# Altium PCB UNO Shield_2021-10-31.pcbdoc
Units mil, origin at the board's own origin, x right, y up, seen from the top; angles counter-clockwise.
Board outline 3800 x 3200 mil, 2 copper layers (Top Layer, Bottom Layer); 26 components, 48 nets, 194 pads, 47 vias.
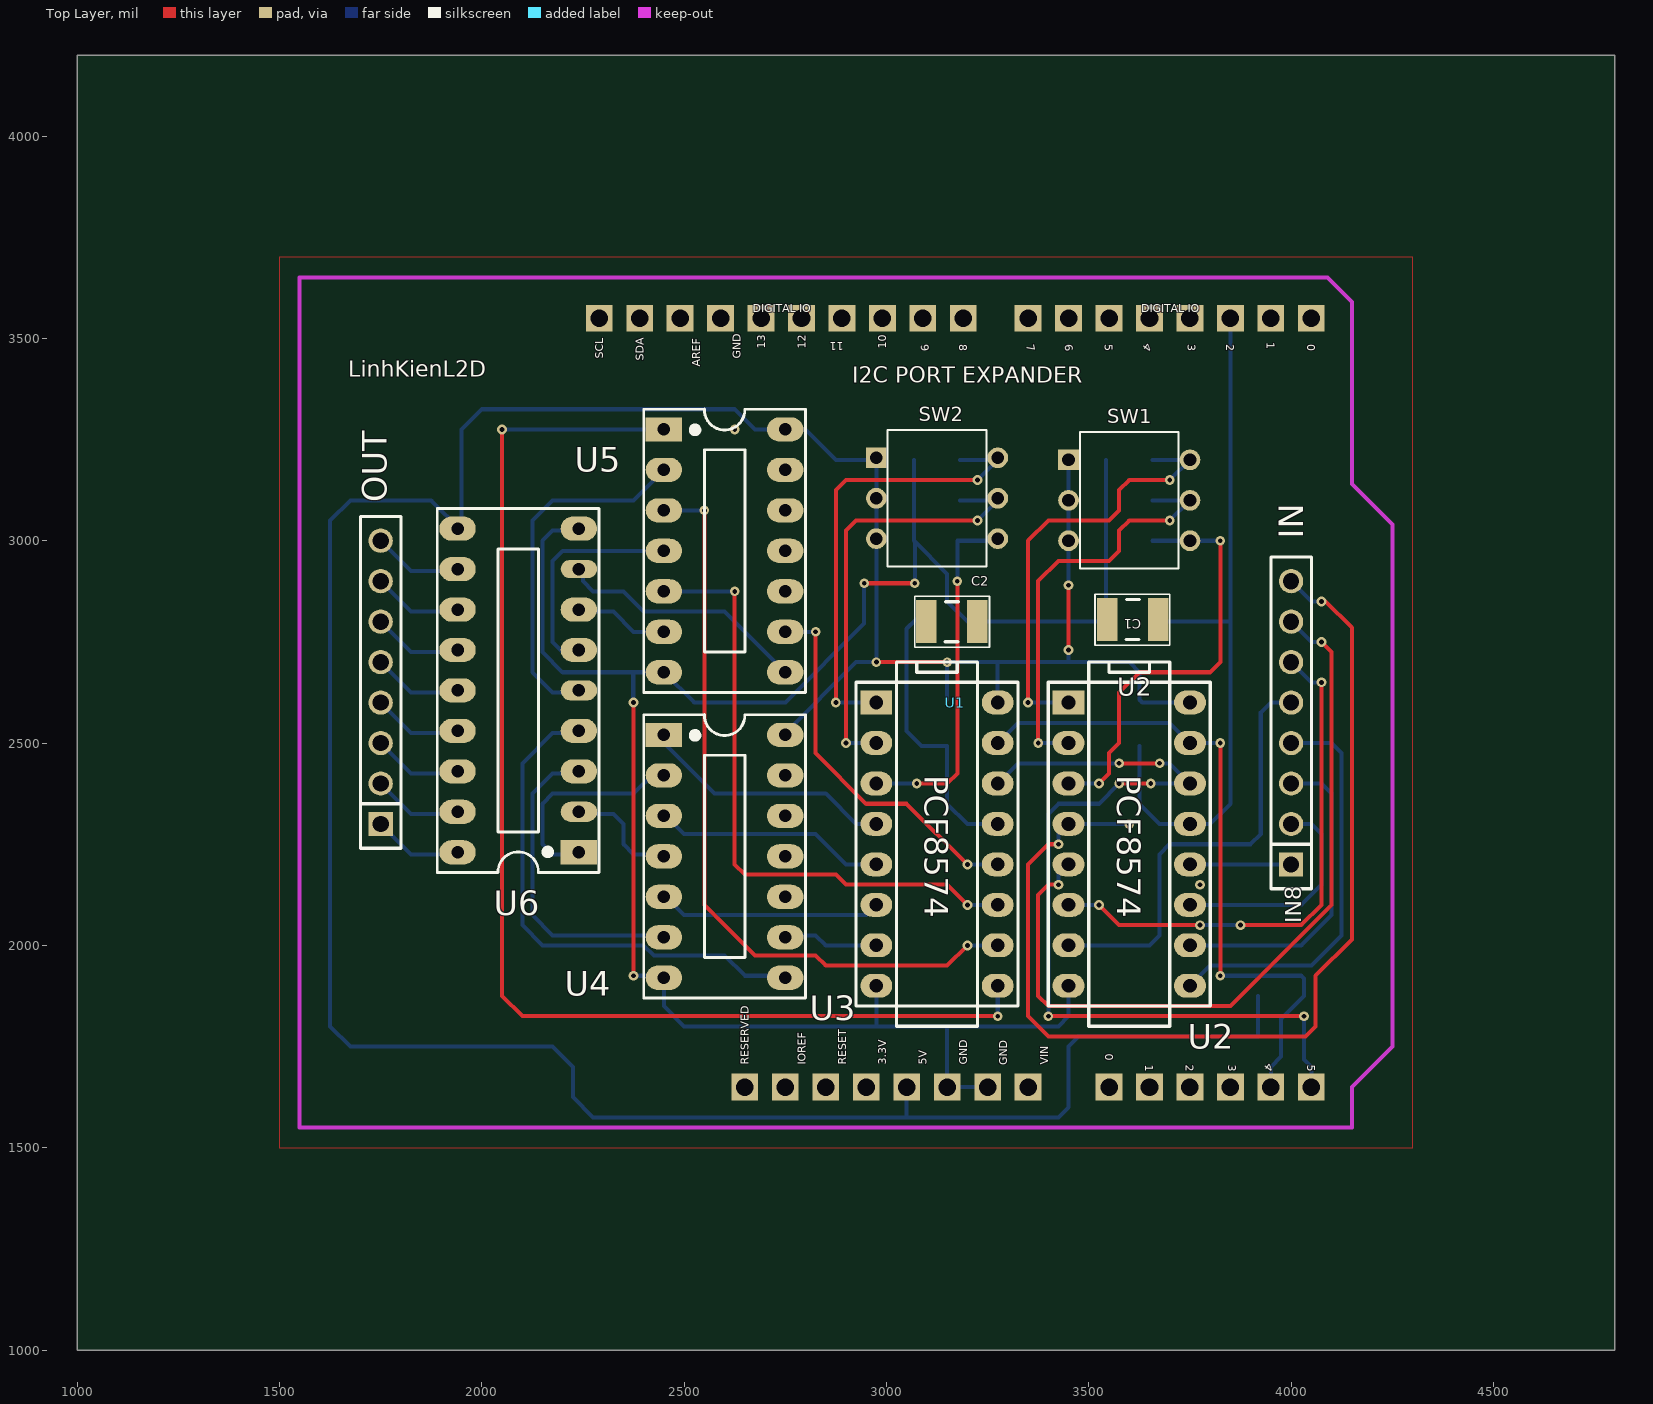
[diagram p0: Top Layer view]
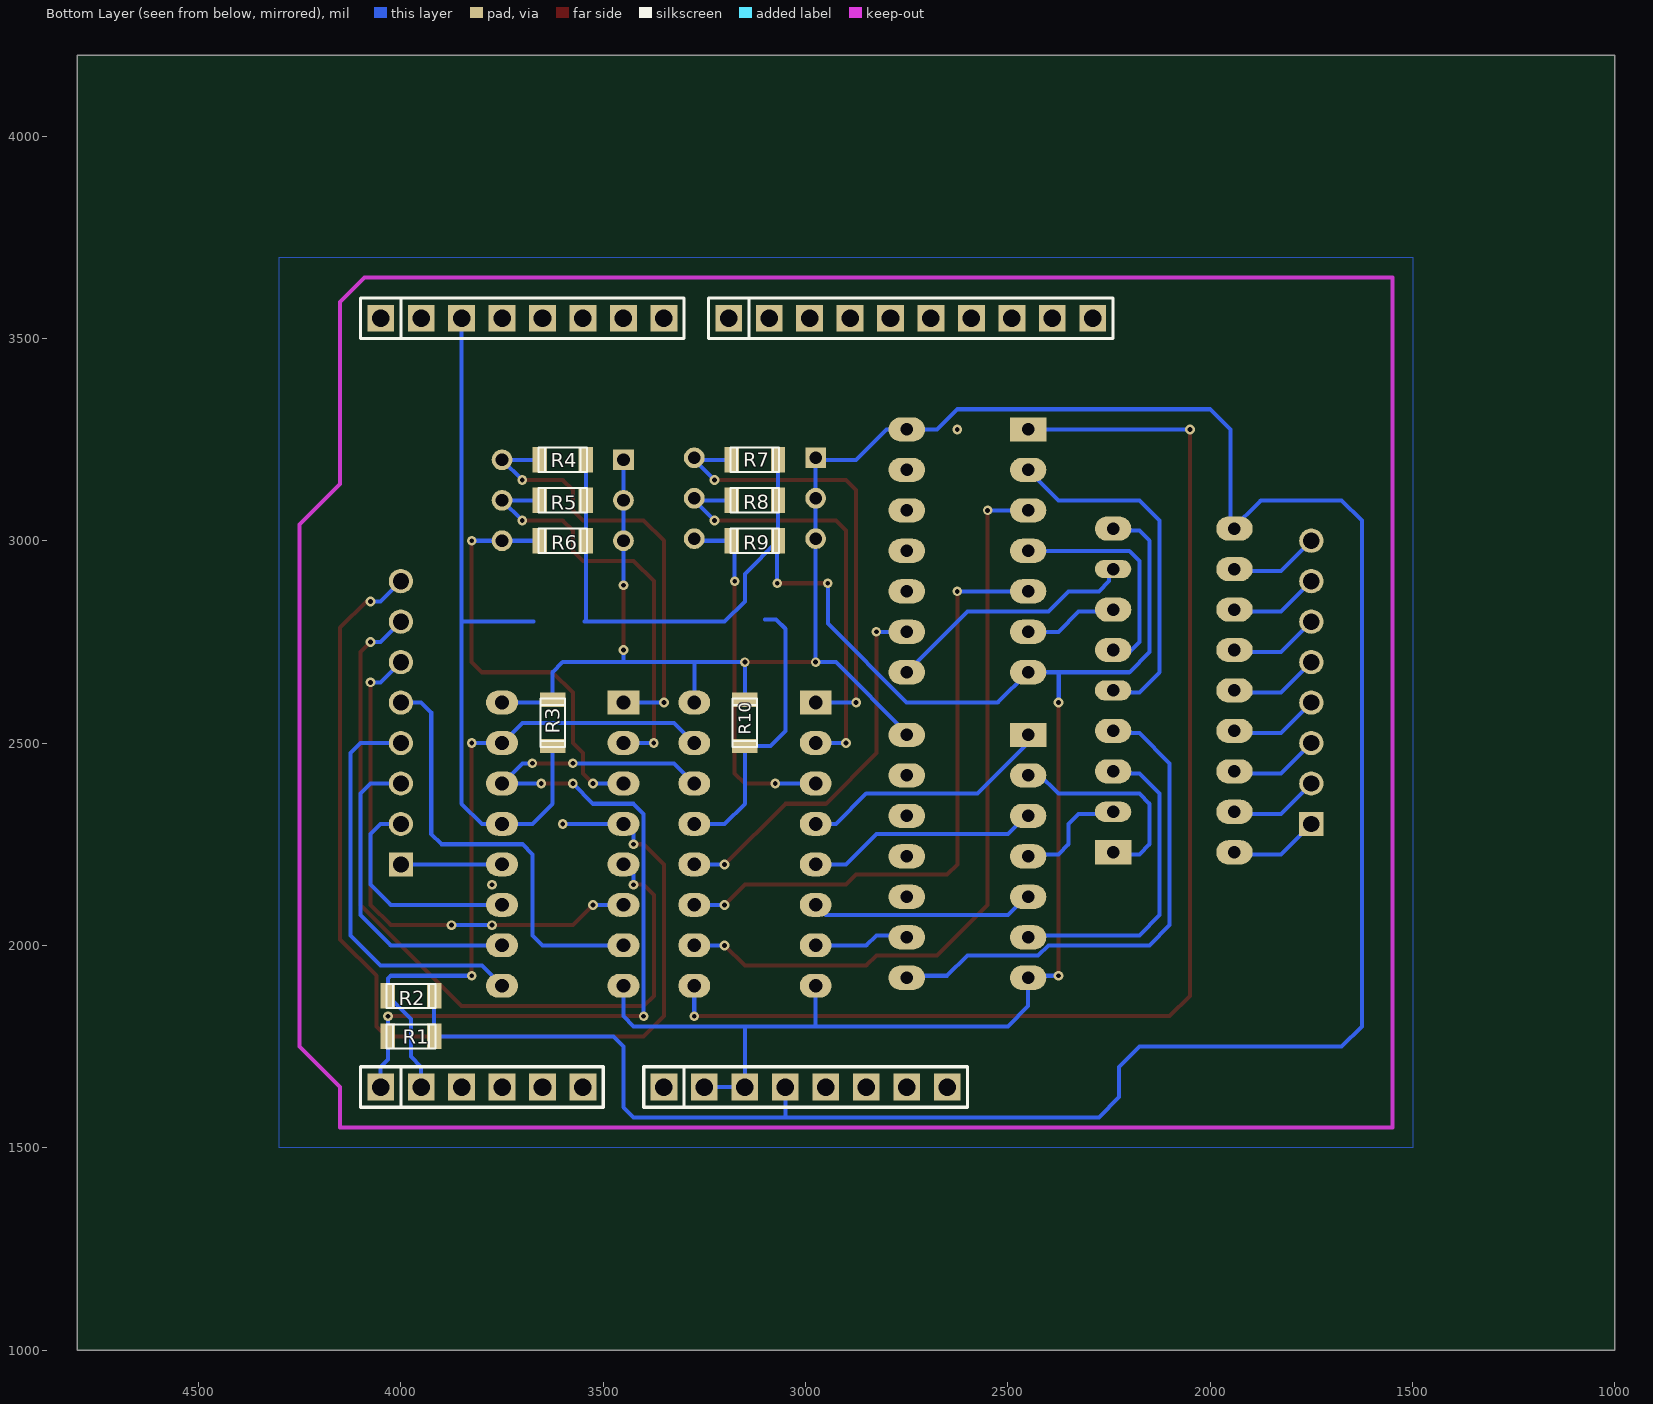
[diagram p1: Bottom Layer view, seen from below]

## Layer stack, top to bottom
Top Solder: solder mask 0.4, Solder Resist, Dk 3.5
Top Layer: signal copper 1.4
Dielectric1: dielectric 12.6, FR-4, Dk 4.8
Bottom Layer: signal copper 1.4
Bottom Solder: solder mask 0.4, Solder Resist, Dk 3.5

## Board outline
4800,1000 1000,1000 1000,4200 4800,4200

## Design rules (kind name [scope] priority, off if disabled: settings)
Clearance [All] p1: gap=10
PolygonConnect [All] p1: connectstyle=Relief reliefconductorwidth=10 reliefentries=4 polygonreliefangle="90 Angle" airgapwidth=10
RoutingVias [All] p1: holewidth=28 width=50 viastyle="Through Hole" minholewidth=28 minwidth=50 maxholewidth=28 maxwidth=50
SolderMaskExpansion [All] p1: expansion=4
Width [All] p1: maxlimit=10 minlimit=10 preferedwidth=10
30 further rules are at their usual default settings.

## Components (designator, comment, footprint, x,y, rotation, side; value= is the part's Value field where it differs from the comment)
C1 "Comment" CN-SMD-3225 3615,2805 r180 top
C2 "Comment" CN-SMD-3225 3155,2800 r0 top
IN "Comment" JP8-C1T 4000,2200 r90 top
OUT "Comment" JP8-C1T 1750,2300 r90 top
R1 "10k" 1206R 3975,1775 r0 bottom
R2 "10k" 1206R 3975,1875 r0 bottom
R3 "10k" 1206R 3625,2550 r270 bottom
R4 "10k" 1206R 3600,3200 r180 bottom
R5 "10k" 1206R 3600,3100 r180 bottom
R6 "10k" 1206R 3600,3000 r180 bottom
R7 "10k" 1206R 3125,3200 r180 bottom
R8 "10k" 1206R 3125,3100 r180 bottom
R9 "10k" 1206R 3125,3000 r180 bottom
R10 "10k" 1206R 3150,2550 r270 bottom
SW1 "Comment" SW-DIP3 3600,3100 r270 top
SW2 "Comment" SW-DIP3 3125,3105 r270 top
U1 "ARDUINOR3-DIMENSION" ARDUINOR3 3170,2600 r0 top
U2 "Comment" DIP16 3600,2250 r270 top
U3 "Comment" DIP16 3125,2250 r270 top
U4 "Comment" DIP14/W0.3 2450,2520 r270 top
U5 "Comment" DIP14/W0.3 2450,3275 r270 top
U6 "Comment" DIP18/W0.3 2240,2230 r90 top
? "Comment" JP6-D1T 4050,1650 r180 bottom
? "Comment" JP8-D1T 3350,1650 r180 bottom
? "Comment" JP10-D1T 3190,3550 r180 bottom
? "Comment" JP8-D1T 4050,3550 r180 bottom

## Footprints (in the part's own frame and the unit in brackets; to place one, negate y for a bottom-side part, rotate by r counter-clockwise, add the part's x,y. Pads: shape width x height; smd on the part's side, far side on the other; paste and mask are expansions set on the pad)
1206R [mil]
  rect 35.4x63 smd: 1(57.1,0) 2(-57.1,0)
  silkscreen extent -60,-30 60,30
ARDUINOR3 [mil]
  rect 66x66 hole 39.4: 3V(-220,-950) 5V(-120,-950) A0(380,-950) A1(480,-950) A2(580,-950) A3(680,-950) A4(780,-950) A5(880,-950) AREF(-680,950) D0(880,950) D1(780,950) D2(680,950) D3(580,950) D4(480,950) D5(380,950) D6(280,950) D7(180,950) D8(20,950) D9(-80,950) D10(-180,950) D11(-280,950) D12(-380,950) D13(-480,950) GND(-580,950) GND1(80,-950) GND2(-20,-950) IOREF(-420,-950) RESERVED(-520,-950) RESET(-320,-950) SCL(-880,950) SDA(-780,950) VIN(180,-950)
  Keep-Out Layer lines w10: -1620,-1050 -1620,1050 920,1050 980,990 980,540 1080,440 1080,-850 980,-950 980,-1050 -1620,-1050
CN-SMD-3225 [mm] "Chip Capacitor, Body 3.2x2.5mm, IPC Medium Density"
  rect 1.3x2.7 smd: 1(-1.445,0) 2(1.755,0)
  silkscreen extent -2.17,-1.6 2.53,1.6, body extent -1.45,-1.25 1.75,1.25, height 1
DIP14/W0.3 [mil] "14PIN, W 300mil, Pin to pin 100mil"
  rect 60x90 hole 31: 1(0,0)
  oval 60x90 hole 31: 2(100,0) 3(200,0) 4(300,0) 5(400,0) 6(500,0) 7(600,0) 8(600,300) 9(500,300) 10(400,300) 11(300,300) 12(200,300) 13(100,300) 14(0,300)
  silkscreen extent -50,-50 650,350, body extent -75,-10 675,305, height 159
DIP16 [mm]
  rect 1.5x2 hole 0.864: 1(-8.897,-3.812)
  oval 1.5x2 hole 0.864: 2(-6.357,-3.812) 3(-3.817,-3.812) 4(-1.277,-3.812) 5(1.263,-3.812) 6(3.803,-3.812) 7(6.343,-3.812) 8(8.883,-3.812) 9(8.883,3.808) 10(6.343,3.808) 11(3.803,3.808) 12(1.263,3.808) 13(-1.277,3.808) 14(-3.817,3.808) 15(-6.357,3.808) 16(-8.897,3.808)
  silkscreen extent -11.44,-5.08 11.42,5.08, body extent -10,-3.93 10,3.94, height 1.99
DIP18/W0.3 [mil] "18 PIN, W 300mil, Pin to pin 100mil"
  rect 60x90 hole 31: 1(0,0)
  oval 50x90 hole 31: 2(100,0) 5(400,0)
  oval 60x90 hole 31: 3(200,0) 4(300,0) 6(500,0) 7(600,0) 9(800,0) 10(800,300) 11(700,300) 12(600,300) 13(500,300) 14(400,300) 15(300,300) 16(200,300) 17(100,300) 18(0,300)
  oval 45x90 hole 31: 8(700,0)
  silkscreen extent -50,-50 850,350, body extent -58,-57 856,357, height 300
JP6-D1T [mm] "6 pins, 1 row, straight, gold plating"
  rect 1.6x1.6 hole 1.1: 1(0,0)
  round 1.6 hole 1.1: 2(2.54,0) 3(5.08,0) 4(7.62,0) 5(10.16,0) 6(12.7,0)
  silkscreen extent -1.27,-1.27 13.97,1.27, body extent -1.27,-1.27 13.97,1.27, height 8.54
JP8-C1T [mm] "8 row, straight, gold plating"
  rect 1.52x1.52 hole 1.02: 1(0,0)
  round 1.52 hole 1.02: 2(2.54,0) 3(5.08,0) 4(7.62,0) 5(10.16,0) 6(12.7,0) 7(15.24,0) 8(17.78,0)
  silkscreen extent -1.52,-1.27 19.3,1.27, body extent -1.52,-1.25 19.3,1.25, height 8.51
JP8-D1T [mm] "8 pins, 1 row, straight, gold plating"
  rect 1.6x1.6 hole 1.1: 1(0,0)
  round 1.6 hole 1.1: 2(2.54,0) 3(5.08,0) 4(7.62,0) 5(10.16,0) 6(12.7,0) 7(15.24,0) 8(17.78,0)
  silkscreen extent -1.27,-1.27 19.05,1.27, body extent -1.27,-1.27 19.05,1.27, height 8.54
JP10-D1T [mm] "10 pins, 1 row, straight, gold plating"
  rect 1.6x1.6 hole 1.1: 1(0,0)
  round 1.6 hole 1.1: 2(2.54,0) 3(5.08,0) 4(7.62,0) 5(10.16,0) 6(12.7,0) 7(15.24,0) 8(17.78,0) 9(20.32,0) 10(22.86,0)
  silkscreen extent -1.27,-1.27 24.13,1.27, body extent -1.27,-1.27 24.13,1.27, height 8.54
SW-DIP3 [mm] "03p, 2.54mm Pitch, Horizontal, IC Type, THT, raised Actuator, black, without Tape, Tube"
  rect 1.3x1.3 hole 0.8: 1(-2.54,-3.81)
  round 1.3 hole 0.8: 2(0,-3.81) 3(2.54,-3.81) 4(2.54,3.81) 5(0,3.81) 6(-2.54,3.81)
  silkscreen extent -4.28,-3.1 4.28,3.1, body extent -4.28,-3.98 4.28,3.89, height 3.95

## Via types
v1: diameter 24, hole 12, Top Layer to Bottom Layer, 47 vias

## Nets (pads, with @x,y where several pads share a name; then routed paths per layer and width w, separated by ;. In a path a pad name is that pad's centre, name@x,y a point inside that pad or via, vN(x,y) a via of type N, cw(c..) or ccw(c..) an arc to the next point about the centre after c; other vN are vias at no path point)
1A-U4:  | length 632.8
  Bottom Layer w10: 2450,2525 2450,2500 2575,2375 2850,2375 2925,2300 2975,2300
1A-U5:  | length 3120.7
  Top Layer w10: v1(2050,3275) 2050,1875 2100,1825 v1(3275,1825)
  Bottom Layer w10: v1(2050,3275) 2450,3275 ; v1(3275,1825) 3275,1900
  other v1: 2625,3275
2A-U4:  | length 576.8
  Bottom Layer w10: 2450,2325 2500,2275 2825,2275 2900,2200 2975,2200
2A-U5:  | length 1882.8
  Top Layer w10: v1(2550,3075) 2550,2100 2675,1975 2825,1975 2850,1950 3150,1950 v1(3200,2000)
  Bottom Layer w10: 2450,3075 v1(2550,3075) ; v1(3200,2000) 3275,2000
3A-U4:  | length 556.1
  Bottom Layer w10: 2450,2125 2500,2075 2950,2075 2975,2100
3A-U5:  | length 1541.4
  Top Layer w10: v1(2625,2875) 2625,2200 2650,2175 2875,2175 2900,2150 3150,2150 v1(3200,2100)
  Bottom Layer w10: 2450,2875 v1(2625,2875) ; v1(3200,2100) 3275,2100
4A-U4:  | length 235.4
  Bottom Layer w10: 2750,2025 2825,2025 2850,2000 2975,2000
4A-U5:  | length 938.9
  Top Layer w10: v1(2825,2775) 2825,2475 2950,2350 3050,2350 v1(3200,2200)
  Bottom Layer w10: 2750,2775 v1(2825,2775) ; v1(3200,2200) 3275,2200
+5V: R1.2 R2.2 R3.2 R10.2 U1.5V | length 8105.9
  Top Layer w10: v1(2975,2700) v1(3150,2700) ; v1(3450,2730) v1(3450,2890)
  Bottom Layer w10: 2750,2525 2925,2700 v1(2975,2700) 2975,3000 2975,3100 2975,3200 2875,3200 2800,3275 2675,3275 2625,3325 2000,3325 1950,3275 1950,3025 1875,3100 1675,3100 1625,3050 1625,1800 1675,1750 2175,1750 2225,1700 2225,1625 2275,1575 3050,1575 ; 3050,1584 3050,1575 ; U1.5V 3050,1600 3050,1575 ; R10.2 v1(3150,2700) 3274.39,2700 ; 3275,2600 3274.39,2600.61 3274.39,2700 ; v1(3450,2730) 3450.26,2729.74 3450.26,2700 ; v1(3450,2890) 3450,3100 3450,3200 ; 3750,2600 3632.1,2600 R3.2 3625,2675 3600,2700 3274.4,2700 ; R2.2 R1.2 3475,1775 3450,1750 3450,1600 3425,1575 3050,1575
A0-U2: R4.2 | length 1105
  Top Layer w10: v1(3350,2600) 3350,3000 3400,3050 3550,3050 3575,3075 3575,3125 3600,3150 v1(3700,3150)
  Bottom Layer w10: v1(3350,2600) 3450,2600 ; R4.2 3750,3200 v1(3700,3150)
A0-U3: R7.2 | length 1149
  Top Layer w10: v1(2875,2600) 2875,3125 2900,3150 v1(3225,3150)
  Bottom Layer w10: v1(2875,2600) 2975,2600 ; R7.2 3275,3200 v1(3225,3150)
A1-U2: R5.2 | length 1055
  Top Layer w10: v1(3375,2500) 3375,2900 3425,2950 3550,2950 3575,2975 3575,3025 3600,3050 v1(3700,3050)
  Bottom Layer w10: v1(3375,2500) 3450,2500 ; R5.2 3750,3100 v1(3700,3050)
A1-U3: R8.2 | length 1099
  Top Layer w10: v1(2900,2500) 2900,3025 2925,3050 v1(3225,3050)
  Bottom Layer w10: v1(2900,2500) 2975,2500 ; R8.2 3275,3100 v1(3225,3050)
A2-U2: R6.2 | length 1069.7
  Top Layer w10: v1(3525,2400) 3550,2425 3550,2475 3575,2500 3575,2625 3625,2675 3800,2675 3825,2700 v1(3825,3000)
  Bottom Layer w10: 3450,2400 v1(3525,2400) ; R6.2 v1(3825,3000)
A2-U3: R9.2 | length 885.3
  Top Layer w10: v1(3075,2400) 3150,2400 3175,2425 v1(3175,2900)
  Bottom Layer w10: 2975,2400 v1(3075,2400) ; v1(3175,2900) 3175.1,2907.1 3175.1,3000 3275,3000
CLOCK: R1.1 U1.A5 | length 2217.1
  Top Layer w10: v1(3400,1825) 3679,1825 v1@4036,1825 ; v1(3575,2400) v1@3650,2400 ; v1(3575,2450) v1(3675,2450)
  Bottom Layer w10: 3275,2400 3325,2450 v1(3575,2450) ; v1(3400,1825) 3400,2325 3425,2350 3525,2350 v1(3575,2400) ; v1@3650,2400 3750,2400 3700,2450 v1(3675,2450) ; v1@4035,1825 4032.1,1822.1 4032.1,1717.9 4050,1700 U1.A5
  other v1: 4032,1825 3653,2400
DATA: R2.1 U1.A4 | length 1678.4
  Top Layer w10: v1(3825,1925) v1(3825,2500)
  Bottom Layer w10: 3275,2500 3325,2550 3700,2550 3750,2500 v1(3825,2500) ; v1(3825,1925) 4025,1925 4032.1,1917.9 R2.1 3975,1817.9 3975,1725 3950,1700 U1.A4
GND: R4.1 R5.1 R6.1 R7.1 R8.1 R9.1 U1.GND1 U1.GND2 | length 5226
  Top Layer w10: v1(2375,1925) v1(2375,2600) ; v1(2945,2895) v1(3070,2895)
  Bottom Layer w10: 2250,3025 2175,3025 2150,3000 2150,2725 2200,2675 2450,2675 2525,2600 2750,2600 2945,2795 v1(2945,2895) ; 2374.26,2675 2374.26,2600.74 v1(2375,2600) ; v1(2375,1925) 2450,1925 2450,1850 2500,1800 3150,1800 U1.GND2 U1.GND1 ; 2975,1800 2975,1900 ; R7.1 R8.1 R9.1 ; v1(3070,2895) 3070,2997.9 R9.1 ; 3125,1800 3425,1800 3450,1825 3450,1900 ; 3542.48,2800 3542.48,2999.58 R6.1 R5.1 R4.1 ; 3545.91,2800 3252.52,2800 3200,2800 3150,2850 3150,2917.9 R9.1
IN1:  | length 2642
  Top Layer w10: v1(3425,2250) 3400,2250 3350,2200 3350,1825 3400,1775 4035,1775 4060,1800 4060,1925 4150,2015 4150,2785 4085,2850 v1(4075,2850)
  Bottom Layer w10: v1(3425,2250) 3425,2275 3450,2300 v1(3600,2300) ; 4000,2900 4050,2850 v1(4075,2850)
IN2:  | length 1965.7
  Top Layer w10: v1(3425,2150) 3400,2150 3375,2125 3375,1875 3400,1850 3850,1850 4100,2100 4100,2725 v1(4075,2750)
  Bottom Layer w10: v1(3425,2150) 3425,2175 3450,2200 ; 4000,2800 4050,2750 v1(4075,2750)
IN3:  | length 1312.1
  Top Layer w10: v1(3525,2100) 3575,2050 v1(3775,2050) ; v1(3875,2050) 4025,2050 4075,2100 v1(4075,2650)
  Bottom Layer w10: 3450,2100 v1(3525,2100) ; v1(3775,2050) v1(3875,2050) ; 4000,2700 4050,2650 v1(4075,2650)
  other v1: 3775,2150
IN4:  | length 1091.4
  Bottom Layer w10: 3450,2000 3650,2000 3675,2025 3675,2225 3700,2250 3900,2250 3925,2275 3925,2575 3950,2600 4000,2600
IN5:  | length 1012.1
  Bottom Layer w10: 3750,1900 3800,1950 4050,1950 4125,2025 4125,2475 4100,2500 4000,2500
IN6:  | length 791.4
  Bottom Layer w10: 3750,2000 4025,2000 4100,2075 4100,2375 4075,2400 4000,2400
IN7:  | length 556.1
  Bottom Layer w10: 3750,2100 4025,2100 4075,2150 4075,2275 4050,2300 4000,2300
IN8:  | length 250
  Bottom Layer w10: 3750,2200 4000,2200
INT: R3.1 U1.D2 | length 1910.1
  Bottom Layer w10: R3.1 3625,2350 3675,2300 3750,2300 3800,2300 3850,2350 3850,2922.5 ; 3671.89,2800.08 3850,2799.81 U1.D2
INV_O1:  | length 541.4
  Bottom Layer w10: 2250,2225 2175,2225 2150,2250 2150,2350 2175,2375 2375,2375 2425,2425 2450,2425
INV_O2:  | length 270.7
  Bottom Layer w10: 2250,2325 2325,2325 2350,2300 2350,2250 2375,2225 2450,2225
INV_O3:  | length 791.4
  Bottom Layer w10: 2250,2425 2175,2425 2125,2375 2125,2075 2175,2025 2450,2025
INV_O4:  | length 1282.8
  Bottom Layer w10: 2250,2525 2175,2525 2100,2450 2100,2050 2150,2000 2400,2000 2425,1975 2600,1975 2650,1925 2750,1925
INV_O5:  | length 897.3
  Bottom Layer w10: 2250,2625 2175,2625 2125,2675 2125,3049.5 2175,3100 2375,3100 2450,3175
INV_O6:  | length 570.7
  Bottom Layer w10: 2250,2725 2200,2725 2175,2750 2175,2950 2200,2975 2450,2975
INV_O7:  | length 220.7
  Bottom Layer w10: 2250,2825 2325,2825 2375,2775 2450,2775
INV_O8:  | length 618.2
  Bottom Layer w10: 2250,2925 2250,2900 2275,2875 2350,2875 2400,2825 2600,2825 2750,2675
NC: R10.1 | length 715.8
  Bottom Layer w10: 3100,2805 3072.48,2805 3050,2782.52 3050,2530 3087.1,2492.9 R10.1 3150,2350 3200,2300 3275,2300
OUT1:  | length 231.1
  Bottom Layer w10: 1750,2300 1825,2225 1950,2225
OUT2:  | length 231.1
  Bottom Layer w10: 1750,2400 1825,2325 1950,2325
OUT3:  | length 231.1
  Bottom Layer w10: 1750,2500 1825,2425 1950,2425
OUT4:  | length 231.1
  Bottom Layer w10: 1750,2600 1825,2525 1950,2525
OUT5:  | length 231.1
  Bottom Layer w10: 1750,2700 1825,2625 1950,2625
OUT6:  | length 231.1
  Bottom Layer w10: 1750,2800 1825,2725 1950,2725
OUT7:  | length 231.1
  Bottom Layer w10: 1750,2900 1825,2825 1950,2825
OUT8:  | length 231.1
  Bottom Layer w10: 1750,3000 1825,2925 1950,2925
S$150: 
S$152: 
S$180: 
S$236: 
pads on no net: ?.1 ?.2 ?.3 ?.4 ?.5 ?.6 ?.7 ?.8 ?.9 ?.10 C1.1 C1.2 C2.1 C2.2 IN.1 IN.2 IN.3 IN.4 IN.5 IN.6 IN.7 IN.8 OUT.1 OUT.2 OUT.3 OUT.4 OUT.5 OUT.6 OUT.7 OUT.8 SW1.1 SW1.2 SW1.3 SW1.4 SW1.5 SW1.6 SW2.1 SW2.2 SW2.3 SW2.4 SW2.5 SW2.6 U1.3V U1.A0 U1.A1 U1.A2 U1.A3 U1.AREF U1.D0 U1.D1 U1.D3 U1.D4 U1.D5 U1.D6 U1.D7 U1.D8 U1.D9 U1.D10 U1.D11 U1.D12 U1.D13 U1.GND U1.IOREF U1.RESERVED U1.RESET U1.SCL U1.SDA U1.VIN U2.1 U2.2 U2.3 U2.4 U2.5 U2.6 U2.7 U2.8 U2.9 U2.10 U2.11 U2.12 U2.13 U2.14 U2.15 U2.16 U3.1 U3.2 U3.3 U3.4 U3.5 U3.6 U3.7 U3.8 U3.9 U3.10 U3.11 U3.12 U3.13 U3.14 U3.15 U3.16 U4.1 U4.2 U4.3 U4.4 U4.5 U4.6 U4.7 U4.8 U4.9 U4.10 U4.11 U4.12 U4.13 U4.14 U5.1 U5.2 U5.3 U5.4 U5.5 U5.6 U5.7 U5.8 U5.9 U5.10 U5.11 U5.12 U5.13 U5.14 U6.1 U6.2 U6.3 U6.4 U6.5 U6.6 U6.7 U6.8 U6.9 U6.10 U6.11 U6.12 U6.13 U6.14 U6.15 U6.16 U6.17 U6.18

## Polygon pours and split planes (outlines as drawn)
GND on Bottom Layer "Bottom Layer-GND" (solid, pour order 0): 1500,3700 1500,1500 4300,1500 4300,3700
GND on Top Layer "Top Layer-GND" (solid, pour order 2): 1500,3700 1500,1500 4300,1500 4300,3700 1500,3700

## Silkscreen, mask and mechanical layers (free items; w line width, h text height)
Top Overlay:
  text "LinhKienL2D" at 1670,3405 h40
  text "I2C PORT EXPANDER" at 2915,3390 h40
  text "U2" at 3570,2617.5 h45
  text "IN8" at 4025,2055 h40 r90
  text "RESERVED" at 2660,1705 h20 r90
  text "GND" at 3200,1705 h20 r90

## Text inside footprints (layer, text, board x,y; h text height)
U1: Top Overlay "IOREF" at 2800,1705 h20 r90; Top Overlay "SDA" at 2400,3445 h20 r90; Top Overlay "SCL" at 2300,3450 h20 r90; Top Overlay "DIGITAL IO" at 3630,3565 h20; Top Overlay "DIGITAL IO" at 2670,3565 h20; Top Overlay "0" at 4040,3485 h20 r270; Top Overlay "1" at 3940,3490 h20 r270; Top Overlay "2" at 3840,3485 h20 r270; Top Overlay "3" at 3745,3485 h20 r270; Top Overlay "4" at 3641.91,3490.88 h20 r234; Top Overlay "5" at 3540,3485 h20 r270; Top Overlay "6" at 3440.04,3484.13 h20 r275; Top Overlay "7" at 3345.18,3483.09 h20 r281; Top Overlay "8" at 3180,3485 h20 r270; Top Overlay "9" at 3085.04,3484.13 h20 r275; Top Overlay "10" at 3000,3475 h20 r90; Top Overlay "11" at 2895,3490 h20 r180; Top Overlay "12" at 2800,3475 h20 r90; Top Overlay "13" at 2700,3475 h20 r90; Top Overlay "GND" at 2640,3450 h20 r90; Top Overlay "AREF" at 2540,3430 h20 r90; Top Overlay "5" at 4040,1705 h20 r270; Top Overlay "4" at 3941.91,1710.88 h20 r234; Top Overlay "3" at 3845,1705 h20 r270; Top Overlay "2" at 3740,1705 h20 r270; Top Overlay "1" at 3640,1705 h20 r270; Top Overlay "0" at 3560,1715 h20 r90; Top Overlay "VIN" at 3400,1705 h20 r90; Top Overlay "GND" at 3297.9,1703.9 h20 r90; Top Overlay "5V" at 3100,1705 h20 r90; Top Overlay "3.3V" at 3000,1705 h20 r90; Top Overlay "RESET" at 2900,1705 h20 r90
U2: Top Overlay "PCF8574" at 3569.92,2420.29 h59.05 r270
U3: Top Overlay "PCF8574" at 3094.92,2420.29 h59.05 r270